# Altium PCB Analog PCB.PcbDoc
Units mil, origin at the board's own origin, x right, y up, seen from the top; angles counter-clockwise.
Board outline 7360 x 6250 mil, 2 copper layers (Top Layer, Bottom Layer), stack 61.2 mil thick; 10 components, 0 nets, 28 pads, 0 vias.
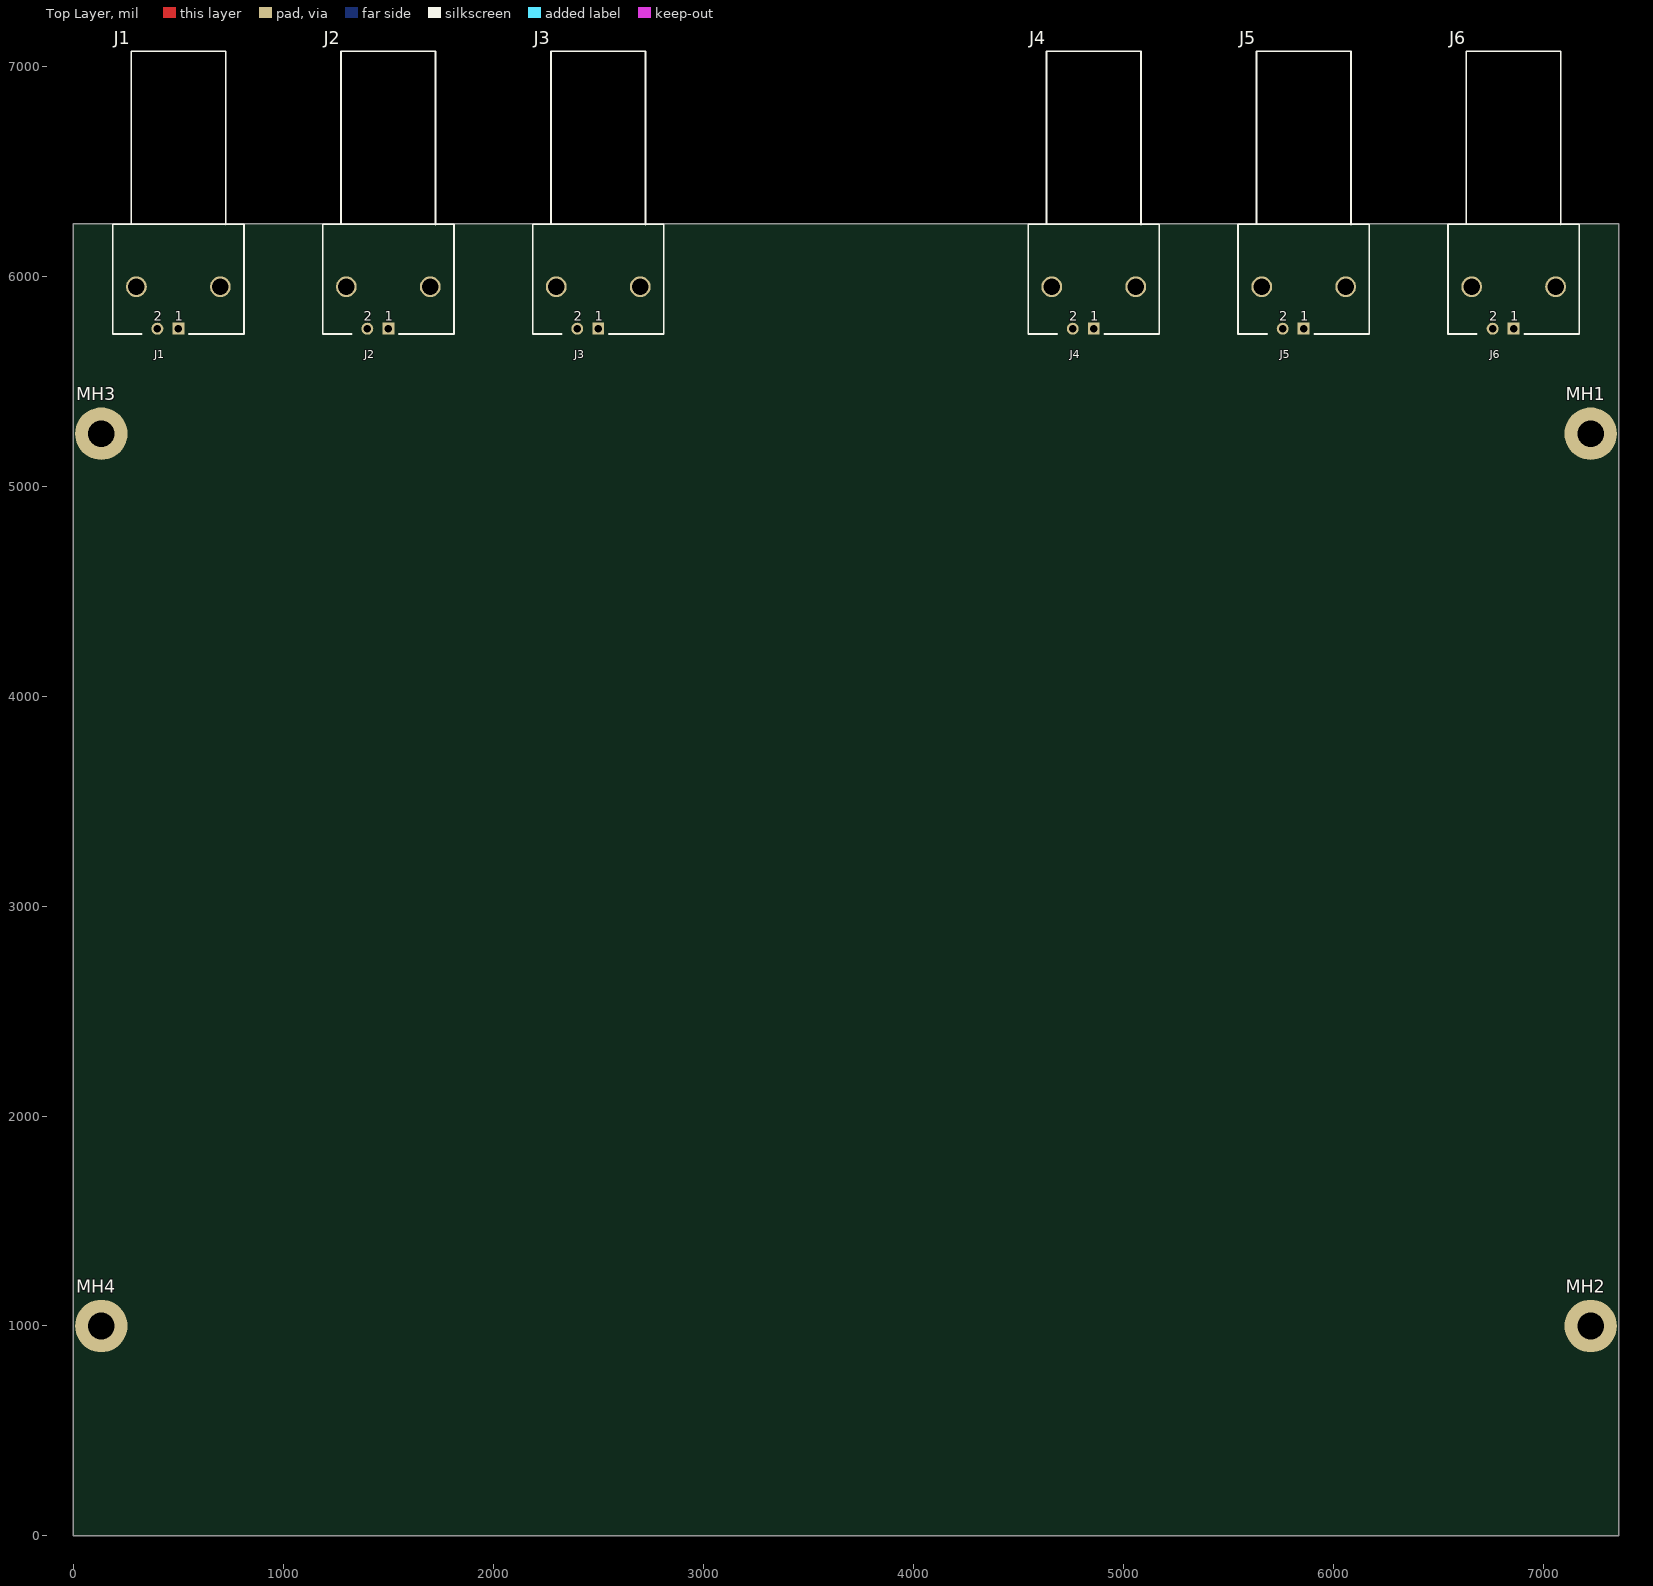
[diagram p0: Top Layer view]
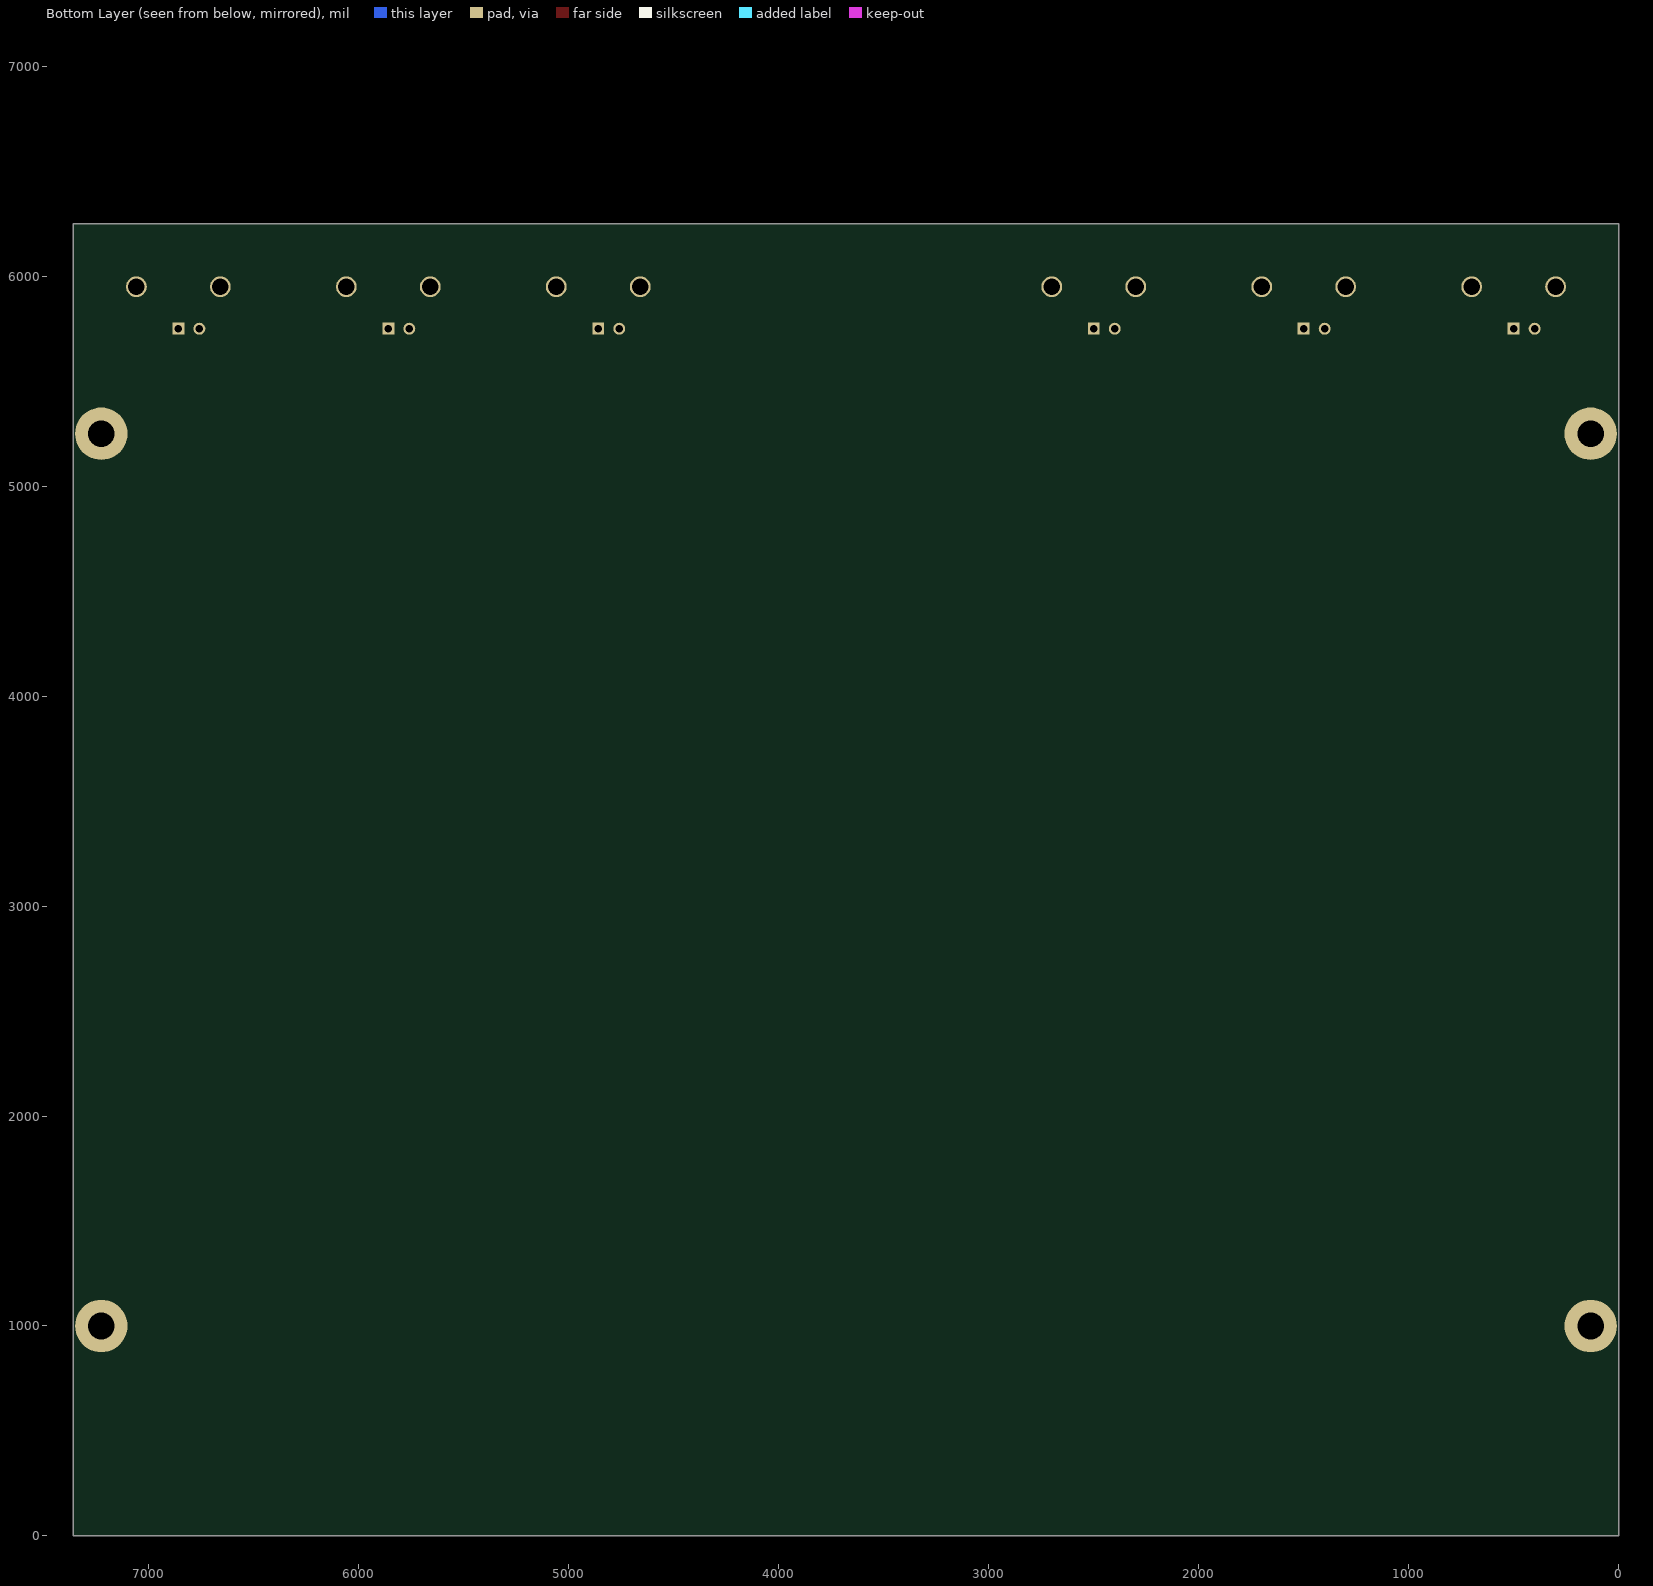
[diagram p1: Bottom Layer view, seen from below]

## Layer stack, top to bottom
Top Solder: solder mask 0.4, Solder Resist, Dk 3.5
Top Layer: signal copper 1.4
Dielectric 1: dielectric 58.4, FR-4, Dk 4.8
Bottom Layer: signal copper 1.4
Bottom Solder: solder mask 0.4, Solder Resist, Dk 3.5

## Board outline
0,0 0,6250 7360,6250 7360,0

## Design rules (kind name [scope] priority, off if disabled: settings)
Clearance [All] p1: gap=10 ignorepadtopadclearanceinfootprint=FALSE
PolygonConnect [All] p1: connectstyle=Relief reliefconductorwidth=10 reliefentries=4 polygonreliefangle="90 Angle" airgapwidth=10
RoutingVias [All] p1: holewidth=28 width=50 viastyle="Through Hole" minholewidth=28 minwidth=50 maxholewidth=28 maxwidth=50
SolderMaskExpansion [All] p1: expansion=4 istentingtop=FALSE
Width [All] p1: maxlimit=10 minlimit=10 preferedwidth=10
30 further rules are at their usual default settings.

## Components (designator, comment, footprint, x,y, rotation, side; value= is the part's Value field where it differs from the comment)
J1 "BNC" URF/BNC/R1.350/FIXED 500,5750 r0 top value="RT ANGLE"
J2 "BNC" URF/BNC/R1.350/FIXED 1500,5750 r0 top value="RT ANGLE"
J3 "BNC" URF/BNC/R1.350/FIXED 2500,5750 r0 top value="RT ANGLE"
J4 "BNC" URF/BNC/R1.350/FIXED 4860,5750 r0 top value="RT ANGLE"
J5 "BNC" URF/BNC/R1.350/FIXED 5860,5750 r0 top value="RT ANGLE"
J6 "BNC" URF/BNC/R1.350/FIXED 6860,5750 r0 top value="RT ANGLE"
MH1 "HOLE_128" HOLE_128 7227,5250 r270 top
MH2 "HOLE_128" HOLE_128 7227,1000 r270 top
MH3 "HOLE_128" HOLE_128 133,5250 r270 top
MH4 "HOLE_128" HOLE_128 133,1000 r270 top

## Footprints (in the part's own frame and the unit in brackets; to place one, negate y for a bottom-side part, rotate by r counter-clockwise, add the part's x,y. Pads: shape width x height; smd on the part's side, far side on the other; paste and mask are expansions set on the pad)
HOLE_128 [mil]
  round 250 hole 128: 1(0,0)
URF/BNC/R1.350/FIXED [mil]
  rect 57x57 / inner round 57 / far side rect 57x57 hole 35: 1(0,0)
  round 57 hole 35: 2(-100,0)
  round 99 hole 79: Hole5(-200,200) Hole6(200,200)
  silkscreen extent -312,-25 312,1321, body extent -289,-78 292,1322, height 626

## Part data
J1 J2 J3 J4 J5 J6: library part 1-00233, "BNC, PCB Panel Mount, Right Angle, Isolated", Cat1=Thru-hole, Cat2=Coax, Cat3=BNC, ComponentLink1Description=datasheet, ComponentLink1URL=http://ventura.corp.thinksrs.com/datasheets/100233/datasheet.pdf, ComponentLink2Description=Info, ComponentLink2URL=http://srsdata.corp.thinksrs.com:3838/ShinyParts/?Detail=100233, Manf=TYCO, Manf P/N=5227161-3, Part Number=1-00233, Type=Connector\Thru-hole\Coax\BNC
MH1 MH2 MH3 MH4: "0.128 mounting hole, clearance for 4-40"

## Nets (pads, with @x,y where several pads share a name; then routed paths per layer and width w, separated by ;. In a path a pad name is that pad's centre, name@x,y a point inside that pad or via, vN(x,y) a via of type N, cw(c..) or ccw(c..) an arc to the next point about the centre after c; other vN are vias at no path point)
pads on no net: J1.1 J1.2 J1.Hole5 J1.Hole6 J2.1 J2.2 J2.Hole5 J2.Hole6 J3.1 J3.2 J3.Hole5 J3.Hole6 J4.1 J4.2 J4.Hole5 J4.Hole6 J5.1 J5.2 J5.Hole5 J5.Hole6 J6.1 J6.2 J6.Hole5 J6.Hole6 MH1.1 MH2.1 MH3.1 MH4.1

## Dimensions
0,0 to 133,1000 on Drill Drawing
0,0 to 133,1000 on Drill Drawing
0,0 to 7360,0 on Drill Drawing
0,0 to 0,6250 on Drill Drawing

## Text inside footprints (layer, text, board x,y; h text height)
J1: Mechanical 1 "2" at 383.33,5788.25 h45; Mechanical 1 "1" at 483.33,5788.25 h45; Top Overlay "2" at 383.33,5788.25 h45; Top Overlay "1" at 483.33,5788.25 h45
J2: Mechanical 1 "2" at 1383.33,5788.25 h45; Mechanical 1 "1" at 1483.33,5788.25 h45; Top Overlay "2" at 1383.33,5788.25 h45; Top Overlay "1" at 1483.33,5788.25 h45
J3: Mechanical 1 "2" at 2383.33,5788.25 h45; Mechanical 1 "1" at 2483.33,5788.25 h45; Top Overlay "2" at 2383.33,5788.25 h45; Top Overlay "1" at 2483.33,5788.25 h45
J4: Mechanical 1 "2" at 4743.33,5788.25 h45; Mechanical 1 "1" at 4843.33,5788.25 h45; Top Overlay "2" at 4743.33,5788.25 h45; Top Overlay "1" at 4843.33,5788.25 h45
J5: Mechanical 1 "2" at 5743.33,5788.25 h45; Mechanical 1 "1" at 5843.33,5788.25 h45; Top Overlay "2" at 5743.33,5788.25 h45; Top Overlay "1" at 5843.33,5788.25 h45
J6: Mechanical 1 "2" at 6743.33,5788.25 h45; Mechanical 1 "1" at 6843.33,5788.25 h45; Top Overlay "2" at 6743.33,5788.25 h45; Top Overlay "1" at 6843.33,5788.25 h45